# Altium PCB PSU.PcbDoc
Units mm, origin at the board's own origin, x right, y up, seen from the top; angles counter-clockwise.
Board outline 57 x 23 mm, 2 copper layers (Top Layer, Bottom Layer); 15 components, 7 nets, 35 pads, 86 vias.
Unrouted connection lines stored in the file: 1.
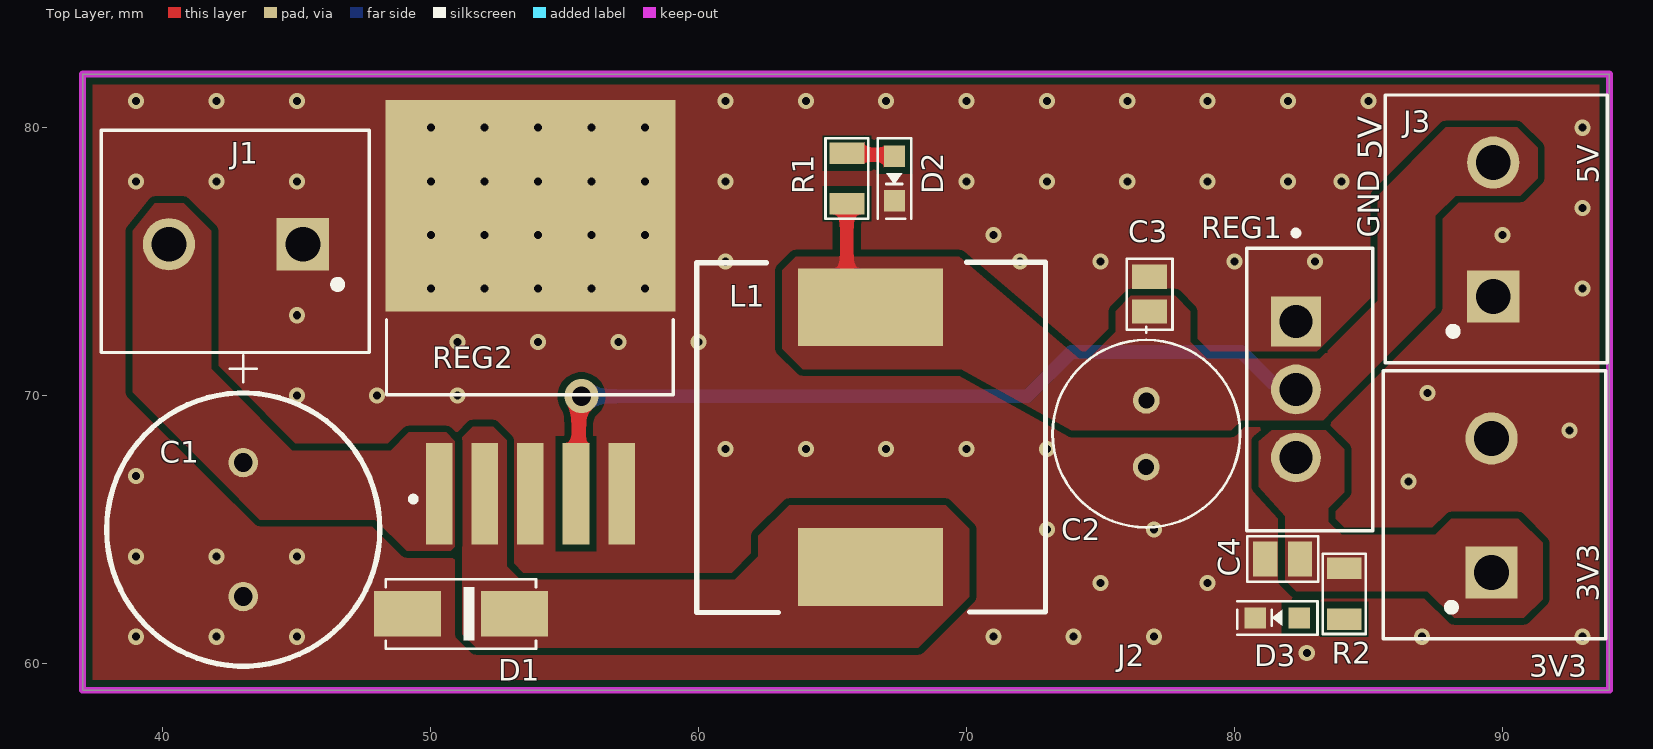
[diagram p0: Top Layer view]
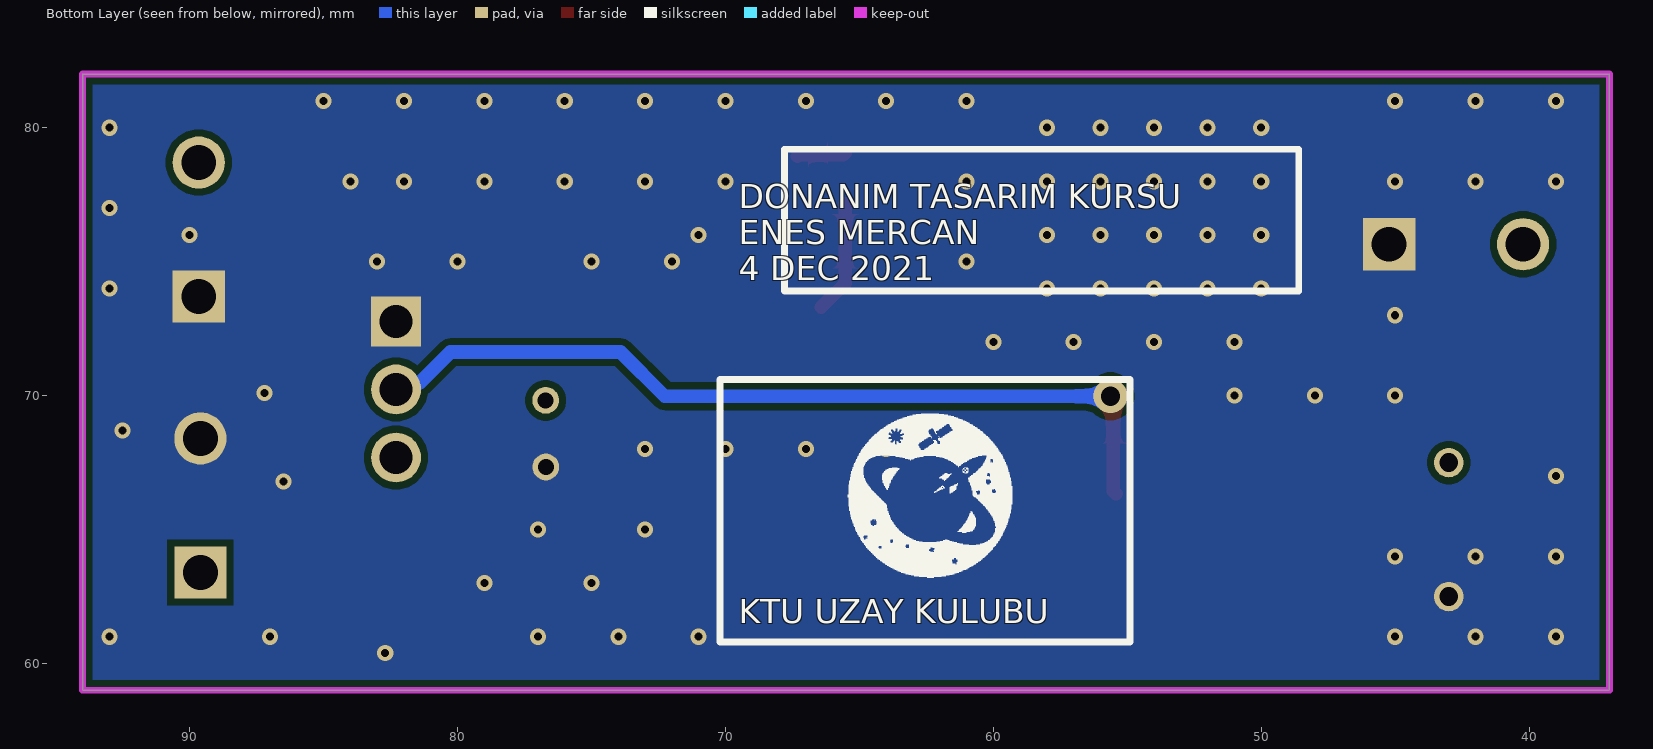
[diagram p1: Bottom Layer view, seen from below]
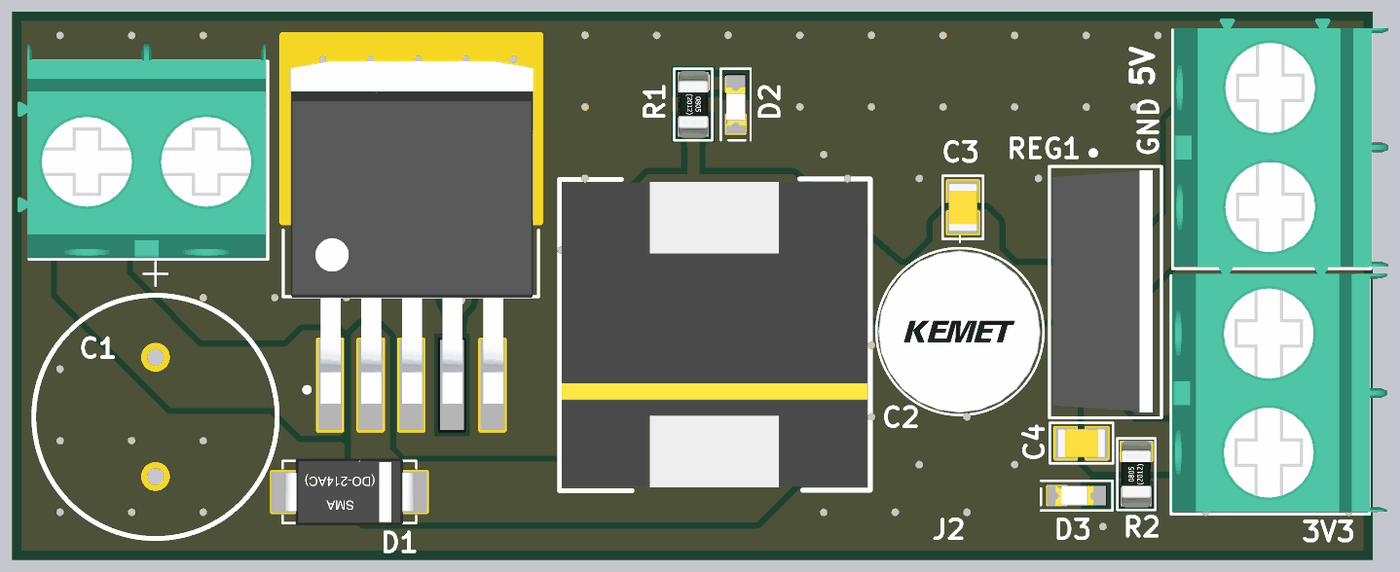
[diagram p2: 3D render of the assembled board from above, using the file's embedded part models]

## Layer stack, top to bottom
Top Solder: solder mask 0.0102, Solder Resist, Dk 3.5
Top Layer: signal copper 0.0356
Dielectric 1: dielectric 0.32, FR-4, Dk 4.8
Bottom Layer: signal copper 0.0356
Bottom Solder: solder mask 0.0102, Solder Resist, Dk 3.5

## Board outline
37,59 37,82 94,82 94,59

## Design rules (kind name [scope] priority, off if disabled: settings)
Clearance [All] p1: gap=0.254 ignorepadtopadclearanceinfootprint=FALSE except(0: Arc-Hole Track-Hole SMDPad-Hole THPad-Hole Via-Hole Fill-Hole Poly-Hole Region-Hole Text-Hole)
PolygonConnect [All] p1: connectstyle=Relief reliefconductorwidth=0.254 reliefentries=4 polygonreliefangle="90 Angle" airgapwidth=0.254
RoutingVias [All] p1: holewidth=0.711 width=1.27 viastyle="Through Hole" minholewidth=0.711 minwidth=1.27 maxholewidth=0.711 maxwidth=1.27
SolderMaskExpansion [All] p1: expansion=0.102 istentingtop=FALSE
Width [All] p1: maxlimit=2.54 minlimit=0.152 preferedwidth=0.254 minimp=50.000000 maximp=50.000000 favimp=50.000000
30 further rules are at their usual default settings.

## Components (designator, comment, footprint, x,y, rotation, side; value= is the part's Value field where it differs from the comment)
C1 "EEU-FR1V681" "CAP ALI 10MM RADIAL" 43,65 r0 top
C2 "ESH227M016AE3AA" "CAP ALI 6.30MM RADIAL" 76.708,68.58 r0 top
C3 "GRM21BR61E106MA73L" "CAP CER 0805" 76.835,73.787 r270 top
C4 "GRM21BR61E106MA73L" "CAP CER 0805" 81.8,63.9 r0 top
D1 "CDBA540-HF" DO-214AC 51.125,61.85 r180 top
D2 "150060VS75000" "LED GR 0603" 67.31,78.105 r90 top
D3 "150060VS75000" "LED GR 0603" 81.6,61.7 r0 top
J1 "2X1 KLEMENS" "2X1 CONNECTOR" 42.725,75.65 r180 top
J2 "2X1 KLEMENS" "2X1 CONNECTOR" 89.6,65.9 r90 top
J3 "2X1 KLEMENS" "2X1 CONNECTOR" 89.662,76.2 r90 top
L1 "SRR1280-330M" SRR1280-330M 66.421,68.453 r90 top
R1 "RC0805FR-07365RL" "RES 0805" 65.532,78.105 r270 top
R2 "RES 220R 0805" "RES 0805" 84.1,62.6 r90 top value=220R
REG1 "LM1117T-3V3" LM1117-3V3 82.296,72.771 r270 top
REG2 "LM2596S-5.0/NOPB" LM2596S-5.0/NOPB 53.848,72.739 r90 top

## Footprints (in the part's own frame and the unit in brackets; to place one, negate y for a bottom-side part, rotate by r counter-clockwise, add the part's x,y. Pads: shape width x height; smd on the part's side, far side on the other; paste and mask are expansions set on the pad)
"2X1 CONNECTOR" [mm]
  rect 1.95x1.95 hole 1.3: 1(-2.5,0)
  round 1.95 hole 1.3: 2(2.5,0)
  silkscreen extent -4.98,-4.26 5.02,4.04, body extent -4.9,-5 5.5,4, height 11.91
"CAP ALI 6.30MM RADIAL" [mm]
  round 1 hole 0.6 paste+0 mask+0.05: 1(0.002,1.244) 2(-0.002,-1.244)
  silkscreen extent -3.5,-3.5 3.5,3.99, body extent -3.42,-3.41 3.38,3.39, height 12.52
"CAP ALI 10MM RADIAL" [mm]
  round 1.1 hole 0.7 paste+0 mask+0.05: 1(0,2.5) 2(0,-2.5)
  silkscreen extent -5.1,-5.1 5.1,6.5, body extent -5,-5 5,5, height 20
"CAP CER 0805" [mm]
  rect 0.9x1.3 smd mask+0.075: 1(-0.65,0) 2(0.65,0)
  silkscreen extent -1.33,-0.85 1.33,0.85, body extent -1,-0.6 1,0.6, height 1.46
DO-214AC [mm]
  rect 2.5x1.7 smd paste+0 mask+0.075: A(2,0) C(-2,0)
  silkscreen extent -2.8,-1.3 2.8,1.3, body extent -2.75,-1.4 2.75,1.4, height 2.6
"LED GR 0603" [mm]
  rect 0.8x0.8 smd mask+0.05: 1(-0.825,0) 2(0.825,0)
  silkscreen extent -1.5,-0.63 1.5,0.62, body extent -0.9,-0.4 0.7,0.4, height 0.7
LM1117-3V3 [mm]
  rect 1.86x1.86 hole 1.24: 1(0,0)
  round 1.86 hole 1.24: 2(2.54,0) 3(5.08,0)
  silkscreen extent -3.4,-1.84 7.81,2.86, body extent -2.58,-1.7 7.58,2.5, height 23.25
LM2596S-5.0/NOPB [mm]
  rect 3.79x0.99 smd: 1(-6.4,3.527) 2(-6.4,1.827) 3(-6.4,0.127) 4(-6.4,-1.573) 5(-6.4,-3.273)
  rect 7.88x10.84 smd paste-6: 3(4.35,0.127)
  silkscreen extent -6.7,-5.2 0.09,5.5, body extent -7.18,-4.98 7.18,5.18, height 4.66
"RES 0805" [mm]
  rect 0.8x1.3 smd mask+0.05: 1(-0.95,0) 2(0.95,0)
  silkscreen extent -1.5,-0.8 1.5,0.8, body extent -1.4,-0.62 1.4,0.62, height 0.8
SRR1280-330M [mil]
  rect 114x213 smd paste+0 mask+0: 1(-191,0) 2(191,0)
  silkscreen extent -258,-257 257,255, body extent -252,-252 252,252, height 315

## Part data
C1: library part "CAP ALUM 680UF 35V  RADIAL", "CAP ALUM 680UF 20% 35V RADIAL", Capacitance=680uF, Case/Package=Radial, ESR (Equivalent Series Resistance)=20mR, Leakage Current=3uA, Manufacturer=Panasonic, Max Operating Temperature=105°C, Min Operating Temperature=-40°C, Package Quantity=200, Ripple Current=2.18A, Supplier Part Number 1=P14514-ND, Tolerance=20%, Voltage=35V, Category="Aluminum Electrolytic Capacitors", ComponentLink1Description=https://datasheet.ciiva.com/11780/0900766b80e4e9bf-11780986.pdf?src-supplier=RSComponents, ComponentLink1URL=https://datasheet.ciiva.com/11780/0900766b80e4e9bf-11780986.pdf?src-supplier=RSComponents, ComponentLink2Description=https://datasheet.ciiva.com/11677/aba0000ce132-11677717.pdf?src-supplier=Avnet, ComponentLink2URL=https://datasheet.ciiva.com/11677/aba0000ce132-11677717.pdf?src-supplier=Avnet, ComponentLink3Description=https://datasheet.ciiva.com/14602/70257620-14602587.pdf?src-supplier=Allied+Electronics, ComponentLink3URL=https://datasheet.ciiva.com/14602/70257620-14602587.pdf?src-supplier=Allied+Electronics, ComponentLink4Description=https://datasheet.ciiva.com/30145/9aba0000ce132-30145388.pdf?src-supplier=Onlinecomponents.com, ComponentLink4URL=https://datasheet.ciiva.com/30145/9aba0000ce132-30145388.pdf?src-supplier=Onlinecomponents.com, ComponentLink5Description=https://datasheet.ciiva.com/17531/aba0000ce132-17531901.pdf?src-supplier=Avnet+Europe, ComponentLink5URL=https://datasheet.ciiva.com/17531/aba0000ce132-17531901.pdf?src-supplier=Avnet+Europe, Construction=RADIAL, Contact Plating=Tin, Diameter=10mm, Height=20mm, Height - Seated (Max)=0.866inch, Impedance=20mR, Lead Diameter=0.6mm, Lead Pitch=5mm, Lead/Base Style=Straight, Length=20mm, Life (Hours)=10000Hour, Manufacturer Part Number=EEU-FR1V681, Mount="Through Hole", Number of Pins=2, Packaging=Bulk, Pricing 1="1=1.09000, 10=0.82700, 50=0.68680, 100=0.59140, 500=0.45788, 1000=0.39429, 2500=0.36885, 5000=0.34977 (USD)", Radiation Hardening=No, REACH SVHC=Unknown, Ripple Current (AC)=2.18A, RoHS=Yes, RoHS Compliant=Yes, Series=FR, Stock 1=13043, Supplier 1=Digi-Key, Termination=Radial, Voltage Rating=35V, Voltage Rating (DC)=35V, Weight=2.5
C2: library part "CAP ALUM 220UF 16V  RADIAL_1", "Capacitor;  Al Electrolytic;  Cap 220 uF;  Tol 20%;  Vol-Rtg 16 VDC;  Radial;  6x11 mm", Capacitance=220uF, Case/Package=Radial, Dielectric Material=Aluminium, Leakage Current=35.2uA, Manufacturer=KEMET, Max Operating Temperature=105°C, Min Operating Temperature=-40°C, Package Quantity=10000, Ripple Current=235mA, Supplier Part Number 1=399-6566-ND, Tolerance=20%, Voltage=16V, Category="Aluminum Electrolytic Capacitors", ComponentLink1Description=https://datasheet.ciiva.com/14587/70233271-14587391.pdf?src-supplier=Allied+Electronics, ComponentLink1URL=https://datasheet.ciiva.com/14587/70233271-14587391.pdf?src-supplier=Allied+Electronics, Diameter=6.3mm, Dissipation Factor=18%, Features="General Purpose", Height=11mm, Height - Seated (Max)=0.492inch, Lead Diameter=0.5mm, Lead Length=20mm, Lead Pitch=0.098inch, Length=11mm, Life (Hours)=2000Hour, Manufacturer Part Number=ESH227M016AE3AA, Mount="Through Hole,PCB", Packaging=Bulk, Pricing 1="1=0.26000, 10=0.17700, 50=0.11780, 100=0.10010, 500=0.07066, 1000=0.06182, 2500=0.05888, 5000=0.05446 (USD)", RoHS=Yes, RoHS Compliant=Yes, Series=ESH, Stock 1=8987, Supplier 1=Digi-Key, Termination=Radial, Voltage Rating=16V, Voltage Rating (DC)=16V, Weight=0.6
C3 C4: library part "CAP CER 10UF 25V 0805", "MURATA - GRM21BR61E106MA73L - SMD Multilayer Ceramic Capacitor, 10 µF, 25 V, 0805 [2012 Metric], ± 20%, X5R, GRM Series", Capacitance=10uF, Case Code (Imperial)=0805, Case Code (Metric)=2012, Dielectric=X5R, Manufacturer=Murata, Max Operating Temperature=85°C, Min Operating Temperature=-55°C, Package Quantity=3000, Resistor Type=Ceramic, Supplier Part Number 1=490-10748-1-ND, Tolerance=20%, Voltage Rating=25V, Case/Package=0805, Category="Ceramic Capacitors", ComponentLink1Description=http://www.farnell.com/datasheets/2079185.pdf?src-supplier=Farnell, ComponentLink1URL=http://www.farnell.com/datasheets/2079185.pdf?src-supplier=Farnell, ComponentLink2Description=http://www.mouser.com/ds/2/281/c02e-2905.pdf?src-supplier=Mouser, ComponentLink2URL=http://www.mouser.com/ds/2/281/c02e-2905.pdf?src-supplier=Mouser, ComponentLink3Description=http://components.arrow.com/part/dataview/0323_03061623?src-supplier=Arrow+Europe, ComponentLink3URL=http://components.arrow.com/part/dataview/0323_03061623?src-supplier=Arrow+Europe, ComponentLink4Description=https://search.murata.co.jp/Ceramy/image/img/A01X/G101/ENG/GRM21BR61E106MA73-01.pdf?src-supplier=Digi-Key, ComponentLink4URL=https://search.murata.co.jp/Ceramy/image/img/A01X/G101/ENG/GRM21BR61E106MA73-01.pdf?src-supplier=Digi-Key, ComponentLink5Description=http://www.farnell.com/datasheets/2079185.pdf?src-supplier=Element14, ComponentLink5URL=http://www.farnell.com/datasheets/2079185.pdf?src-supplier=Element14, Depth=1.25mm, Height=1.25mm, Lead Free="Lead Free", Length=2mm, Manufacturer Part Number=GRM21BR61E106MA73L, Mount="Surface Mount", Packaging="Tape and Reel", Pricing 1="1=0.26000, 10=0.17900, 50=0.11960, 100=0.10170, 500=0.07176, 1000=0.06279 (USD)", REACH SVHC="No SVHC", RoHS=Yes, RoHS Compliant=Yes, Stock 1=318119, Supplier 1=Digi-Key, Termination=SMD/SMT, Thickness=0.055inch, Voltage Rating (DC)=25V, Weight=0.000335oz, Width=0.049inch
D1: "DIODE SCHOTTKY 40V 5A DO214AC", Average Rectified Current=5A, Manufacturer=Comchip, Max Reverse Voltage (DC)=40V, Supplier Part Number 1=641-1707-1-ND, Category="Rectifier Diodes", ComponentLink1Description=http://www.mouser.com/ds/2/80/CDBA520-HF%20Thru134737.%20CDBA5200-HF%20RevB-221146.pdf?src-supplier=Mouser, ComponentLink1URL=http://www.mouser.com/ds/2/80/CDBA520-HF%20Thru134737.%20CDBA5200-HF%20RevB-221146.pdf?src-supplier=Mouser, ComponentLink2Description=http://www.comchiptech.com/admin/files/product/CDBA540-HF%20Thru504741.%20CDBA5200-HF%20RevC.pdf?src-supplier=Digi-Key, ComponentLink2URL=http://www.comchiptech.com/admin/files/product/CDBA540-HF%20Thru504741.%20CDBA5200-HF%20RevC.pdf?src-supplier=Digi-Key, Manufacturer Part Number=CDBA540-HF, Mount="Surface Mount", Packaging="Tape and Reel", Pricing 1="1=0.51000, 10=0.41000, 100=0.27930, 500=0.20948, 1000=0.15711, 2000=0.14402 (USD)", RoHS=Yes, RoHS Compliant=Yes, Series=-, Stock 1=101065, Supplier 1=Digi-Key
D2 D3: library part "LED GR 0603", "CRCW Thick Film Commodity Chip Resistor 0603 Size 5.1K Ohm 1% 0.1 W 100 ppm/K 2-Pin SMD Paper T/R", Case Code (Imperial)=0603, Case Code (Metric)=1608, Color=Green, Forward Current=30mA, Forward Voltage=2V, Manufacturer="Wurth Electronics", Max Operating Temperature=85°C, Max Power Dissipation=100mW, Min Operating Temperature=-40°C, Package Quantity=1, Resistance=5.1kR, Resistor Type="Thick Film", Supplier Part Number 1=732-4980-1-ND, Temperature Coefficient=100ppm/°C, Test Current=20mA, Tolerance=1%, Case/Package=0603, Category=LEDs, ComponentLink1Description=https://datasheet.ciiva.com/29562/150060vs75000-29562919.pdf?src-supplier=Digi-Key, ComponentLink1URL=https://datasheet.ciiva.com/29562/150060vs75000-29562919.pdf?src-supplier=Digi-Key, ComponentLink2Description=http://www.vishay.com/docs/28773/crcwce3.pdf?src-supplier=Digi-Key, ComponentLink2URL=http://www.vishay.com/docs/28773/crcwce3.pdf?src-supplier=Digi-Key, Dominant Wavelength=570nm, Height=0.7mm, Length=1.6mm, Lens Style=Clear,Rectangular, Luminous Intensity=40mcd, Manufacturer Part Number=150060VS75000, Mount="Surface Mount", Number of Pins=2, Number of Terminations=2, Packaging="Tape and Reel", Pricing 1="1=0.14000, 50=0.13300, 100=0.11400, 500=0.10500, 1000=0.09900 (USD)", Pricing 2="1=0.10000, 10=0.03600, 100=0.01450, 1000=0.00652, 2500=0.00566, 5000=0.00468 (USD)", REACH SVHC=Unknown, RoHS=Yes, RoHS Compliant=Yes, Stock 1=170555, Stock 2=49532, Supplier 1=Digi-Key, Supplier 2=Digi-Key, Supplier Part Number 2=541-CRCW06035K10FKEBCCT-ND, Viewing Angle=140°, Wavelength=570nm, Weight=0.025, Width=0.8mm
J1 J2 J3: "Conn PC Terminal Block 2 POS 5mm Solder ST Thru-Hole 17.5A", Color=Green, Current=18A, Current Rating=17.5A, Flammability Rating="UL94 V-0", Manufacturer="Phoenix Contact", Manufacturer Part Number=1935161, Max Current Rating=16A, Max Supply Voltage=250V, Package Quantity=250, Supplier Part Number 1=277-1667-ND, Voltage=300V, Voltage Rating (DC)=320V, Approvals=UL, Category="Terminal Blocks", ComponentLink1Description=https://datasheet.ciiva.com/16047/1935161-16047247.pdf?src-supplier=Onlinecomponents.com, ComponentLink1URL=https://datasheet.ciiva.com/16047/1935161-16047247.pdf?src-supplier=Onlinecomponents.com, ComponentLink2Description=https://datasheet.ciiva.com/15169/getdatasheetpartid-177903-15169663.pdf?src-supplier=Verical, ComponentLink2URL=https://datasheet.ciiva.com/15169/getdatasheetpartid-177903-15169663.pdf?src-supplier=Verical, ComponentLink3Description=https://datasheet.ciiva.com/824/combiconcompact5-0mmseries-824222.pdf?src-supplier=Digi-Key, ComponentLink3URL=https://datasheet.ciiva.com/824/combiconcompact5-0mmseries-824222.pdf?src-supplier=Digi-Key, Connector Type=Screw, Contact Material=Copper,Tin, Depth=9mm, Height=11.3mm, Housing Color=Green, Housing Material=Polyamide, Insulation Material=Nylon, Lead Free="Lead Free", Length=9mm, Material=Nylon, Mount="Through Hole", Number of Circuits=2, Number of Contacts=2, Number of Levels=1, Number of Pins=2, Number of Poles=2, Number of Positions=2, Number of Positions Per Level=2, Number of Rows=1, Number of Ways=2, Orientation=Straight, Packaging=Bulk, Pitch=5mm, Pricing 1="1=0.47000, 10=0.44900, 50=0.42900, 100=0.41730, 250=0.39000, 500=0.37128 (USD)", Radiation Hardening=No, REACH SVHC=Unknown, RoHS=Yes, RoHS Compliant=Yes, Series="COMBICON PT", Stock 1=135087, Supplier 1=Digi-Key, Termination=Solder, Voltage Rating=250V, Weight=0.067021oz, Width=14.9mm, Wire Gauge (Max)=26AWG, Wire Gauge (Min)=12AWG, Wire/Cable Gauge=26AWG
L1: library part "IND 33uH", "33uH 20% 100KHz Ind Power Shielded Wirewound  28Q-Factor Ferrite 3.5A T/R", Case/Package=Nonstandard, Current Rating=3.5A, DC Resistance (DCR)=57mR, Frequency=9.5MHz, Inductance=33uH, Inductance Tolerance=20%, Manufacturer=Bourns, Max Operating Temperature=125°C, Min Operating Temperature=-40°C, Package Quantity=400, Resistance=57MR, Resistor Type=Wirewound, Saturation Current=3.3A, Supplier Part Number 1=SRR1280-330MCT-ND, Test Frequency=100kHz, Category="Fixed Inductors", ComponentLink1Description=https://datasheet.ciiva.com/11799/0900766b80ddd400-11799870.pdf?src-supplier=RSComponents, ComponentLink1URL=https://datasheet.ciiva.com/11799/0900766b80ddd400-11799870.pdf?src-supplier=RSComponents, ComponentLink2Description=https://datasheet.ciiva.com/17112/70277071-17112985.pdf?src-supplier=Allied+Electronics, ComponentLink2URL=https://datasheet.ciiva.com/17112/70277071-17112985.pdf?src-supplier=Allied+Electronics, ComponentLink3Description=https://datasheet.ciiva.com/8512/srr1280-8512893.pdf?src-supplier=Avnet, ComponentLink3URL=https://datasheet.ciiva.com/8512/srr1280-8512893.pdf?src-supplier=Avnet, ComponentLink4Description=https://datasheet.ciiva.com/6696/srr1280-6696735.pdf?src-supplier=Digi-Key, ComponentLink4URL=https://datasheet.ciiva.com/6696/srr1280-6696735.pdf?src-supplier=Digi-Key, ComponentLink5Description=https://datasheet.ciiva.com/17285/srr1280-17285215.pdf?src-supplier=Avnet+Europe, ComponentLink5URL=https://datasheet.ciiva.com/17285/srr1280-17285215.pdf?src-supplier=Avnet+Europe, ComponentLink6Description=https://datasheet.ciiva.com/30162/srr1280-30162751.pdf?src-supplier=Onlinecomponents.com, ComponentLink6URL=https://datasheet.ciiva.com/30162/srr1280-30162751.pdf?src-supplier=Onlinecomponents.com, ComponentLink7Description=https://datasheet.ciiva.com/48488/srr1280-48488287.pdf?src-supplier=Avnet, ComponentLink7URL=https://datasheet.ciiva.com/48488/srr1280-48488287.pdf?src-supplier=Avnet, Core Material=Ferrite, DC Current=3.5A, Depth=12.8mm, Height=7.5mm, Height - Seated (Max)=0.315inch, Length=12.5mm, Manufacturer Part Number=SRR1280-330M, Material=Steel, Max DC Current=3.5A, Military Standard=Not, Mount="Surface Mount", Number of Pins=2, Packaging="Tape and Reel", Pricing 1="1=1.25000, 10=1.16400, 25=1.07400, 50=0.89520, 100=0.84140 (USD)", Q Factor=28, Radiation Hardening=No, REACH SVHC="No SVHC", RMS Current (Irms)=3.5A, RoHS=Yes, RoHS Compliant=Yes, Sample Rate (Hz)=100kHz, Self Resonant Frequency=9.5MHz, Series=SRR1280, Shielding=Shielded, Stock 1=7352, Supplier 1=Digi-Key, Termination=SMD/SMT, Tolerance=20%, Weight=4.2, Width=12.5mm
R1: library part "RES 365R 0805", "RES SMD 365 OHM 1% 1/8W 0805", Case Code (Imperial)=0805, Case Code (Metric)=2012, Manufacturer=Yageo, Max Operating Temperature=155°C, Max Power Dissipation=125mW, Min Operating Temperature=-55°C, Resistance=365R, Resistor Type="Thick Film", Supplier Part Number 1=311-365CRCT-ND, Temperature Coefficient=100ppm/°C, Tolerance=1%, Voltage Rating=150V, Case/Package=0805, Category="Chip SMD Resistors", ComponentLink1Description=http://components.arrow.com/part/dataview/0323_03541250?src-supplier=Arrow+Europe, ComponentLink1URL=http://components.arrow.com/part/dataview/0323_03541250?src-supplier=Arrow+Europe, ComponentLink2Description=http://www.yageo.com/documents/recent/PYu-RC_Group_51_RoHS_L_9.pdf?src-supplier=Digi-Key, ComponentLink2URL=http://www.yageo.com/documents/recent/PYu-RC_Group_51_RoHS_L_9.pdf?src-supplier=Digi-Key, ComponentLink3Description=http://www.yageo.ru/pdf/RC0805.pdf?src-supplier=Mouser, ComponentLink3URL=http://www.yageo.ru/pdf/RC0805.pdf?src-supplier=Mouser, ComponentLink4Description=http://www.yageo.ru/pdf/RC0805.pdf?src-supplier=Future+Electronics, ComponentLink4URL=http://www.yageo.ru/pdf/RC0805.pdf?src-supplier=Future+Electronics, ComponentLink5Description=http://www.yageo.com.tw/exep/pages/download/literatures/PYu-R_INT-thick_7.pdf?src-supplier=Digi-Key, ComponentLink5URL=http://www.yageo.com.tw/exep/pages/download/literatures/PYu-R_INT-thick_7.pdf?src-supplier=Digi-Key, Construction=Rectangular, Depth=1.25mm, Features="Moisture Resistant", Height=0.5mm, Lead Free="Lead Free", Length=2mm, Manufacturer Part Number=RC0805FR-07365RL, Military Standard=Not, Number of Terminations=2, Packaging="Tape and Reel", Power Rating=125mW, Pricing 1="1=0.10000, 10=0.04200, 100=0.01690, 1000=0.00759, 2500=0.00659 (USD)", RoHS=Yes, RoHS Compliant=Yes, Series=RC, Size Code=0805, Stock 1=53868, Supplier 1=Digi-Key, Termination=SMD/SMT, Voltage Rating (DC)=150V, Weight=0.002, Width=1.25mm
R2: "Res Thick Film 0805 220 Ohm 5% 0.125W(1/8W) ±100ppm/C Pad SMD Automotive T/R", Manufacturer="TE Connectivity", Manufacturer Part Number=CRGCQ0805J220R, Supplier Part Number 1=A130130CT-ND, Category="Chip SMD Resistors", Pricing 1="1=0.10000, 10=0.04300, 100=0.01740, 1000=0.00783, 2500=0.00680 (USD)", RoHS=Yes, RoHS Compliant=Yes, Stock 1=66860, Supplier 1=Digi-Key
REG1: "800-mA 15-V linear voltage regulator 3-TO-220 0 to 125", Case/Package=TO-220, Current Rating=800A, Dropout Voltage=1.2V, Manufacturer="TI National Semiconductor", Manufacturer Part Number=LM1117T-3.3/NOPB, Max Input Voltage=15V, Max Operating Temperature=125°C, Max Output Current=800mA, Min Operating Temperature=-40°C, Nominal Output Voltage=3.3V, Output Voltage Accuracy=1%, Package Quantity=45, Quiescent Current=10mA, Supplier Part Number 1=926-LM1117T-3.3/NOPB, Accuracy=1%, Category="Voltage Regulators - Linear", ComponentLink1Description=https://datasheet.ciiva.com/15111/getdatasheetpartid-67377-15111321.pdf?src-supplier=Verical, ComponentLink1URL=https://datasheet.ciiva.com/15111/getdatasheetpartid-67377-15111321.pdf?src-supplier=Verical, ComponentLink2Description=https://datasheet.ciiva.com/19480/242115-19480555.pdf?src-supplier=Jameco, ComponentLink2URL=https://datasheet.ciiva.com/19480/242115-19480555.pdf?src-supplier=Jameco, ComponentLink3Description=https://datasheet.ciiva.com/41457/001013630-da-01-en-ic-reg-ldo-lm1117t-3-3-nopb-to-220-3-tid-41457409.pdf?src-supplier=Conrad, ComponentLink3URL=https://datasheet.ciiva.com/41457/001013630-da-01-en-ic-reg-ldo-lm1117t-3-3-nopb-to-220-3-tid-41457409.pdf?src-supplier=Conrad, ComponentLink4Description=https://datasheet.ciiva.com/26904/lm1117t-3-3-nopb-26904894.pdf?src-supplier=IIIC, ComponentLink4URL=https://datasheet.ciiva.com/26904/lm1117t-3-3-nopb-26904894.pdf?src-supplier=IIIC, ComponentLink5Description=https://datasheet.ciiva.com/1511/1882372-1511717.pdf?src-supplier=Element14, ComponentLink5URL=https://datasheet.ciiva.com/1511/1882372-1511717.pdf?src-supplier=Element14, ComponentLink6Description=https://datasheet.ciiva.com/2047/lm1117-n-2047767.pdf?src-supplier=Digi-Key, ComponentLink6URL=https://datasheet.ciiva.com/2047/lm1117-n-2047767.pdf?src-supplier=Digi-Key, ComponentLink7Description=https://datasheet.ciiva.com/14150/ialm1117t-e-14150010.pdf?src-supplier=Distrelec, ComponentLink7URL=https://datasheet.ciiva.com/14150/ialm1117t-e-14150010.pdf?src-supplier=Distrelec, Contact Plating=Tin,Matte, Height=8.89mm, Lead Free="Lead Free", Length=10.16mm, Mount="Through Hole", Number of Outputs=1, Number of Pins=3, Output Current=800mA, Output Type=Fixed, Output Voltage=3.3V, Packaging=Rail/Tube, Polarity=Positive, Pricing 1="1=1.77000, 10=1.59000, 50=1.50000, 100=1.50000, 1000=1.50000, 10000=1.50000 (USD)", Radiation Hardening=No, REACH SVHC="No SVHC", RoHS=Yes, RoHS Compliant=Yes, Stock 1=1900, Supplier 1=Mouser, Weight=0.01lb, Width=4.7mm
REG2: "Conv DC-DC 4.5V to 40V Inv/Step Down Single-Out 5V 3A 6-Pin(5+Tab) TO-263 Tube", Case/Package=TO-263, Manufacturer="TI National Semiconductor", Max Input Voltage=40V, Max Operating Temperature=125°C, Max Output Current=3A, Min Input Voltage=4.5V, Min Operating Temperature=-40°C, Nominal Output Voltage=5V, Package Quantity=45, Quiescent Current=5mA, Supplier Part Number 1=926-LM2596S-5.0/NOPB, Switching Frequency=173kHz, Category="Power Supply Modules", ComponentLink1Description=https://datasheet.ciiva.com/15112/getdatasheetpartid-112894-15112928.pdf?src-supplier=Verical, ComponentLink1URL=https://datasheet.ciiva.com/15112/getdatasheetpartid-112894-15112928.pdf?src-supplier=Verical, ComponentLink2Description=https://datasheet.ciiva.com/14150/jqlm2596x-xx-e-14150651.pdf?src-supplier=Distrelec, ComponentLink2URL=https://datasheet.ciiva.com/14150/jqlm2596x-xx-e-14150651.pdf?src-supplier=Distrelec, ComponentLink3Description=https://datasheet.ciiva.com/27050/836385-27050287.pdf?src-supplier=Jameco, ComponentLink3URL=https://datasheet.ciiva.com/27050/836385-27050287.pdf?src-supplier=Jameco, ComponentLink4Description=https://datasheet.ciiva.com/41457/001013813-da-01-en-ic-reg-buc-lm2596s-5-0-nopb-to-263-5-tid-41457757.pdf?src-supplier=Conrad, ComponentLink4URL=https://datasheet.ciiva.com/41457/001013813-da-01-en-ic-reg-buc-lm2596s-5-0-nopb-to-263-5-tid-41457757.pdf?src-supplier=Conrad, ComponentLink5Description=https://datasheet.ciiva.com/6596/lm2596-6596343.pdf?src-supplier=Digi-Key, ComponentLink5URL=https://datasheet.ciiva.com/6596/lm2596-6596343.pdf?src-supplier=Digi-Key, ComponentLink6Description=https://datasheet.ciiva.com/22669/1874590-22669463.pdf?src-supplier=Element14, ComponentLink6URL=https://datasheet.ciiva.com/22669/1874590-22669463.pdf?src-supplier=Element14, ComponentLink7Description=https://datasheet.ciiva.com/16536/lm2596-16536124.pdf?src-supplier=Avnet+Asia, ComponentLink7URL=https://datasheet.ciiva.com/16536/lm2596-16536124.pdf?src-supplier=Avnet+Asia, Contact Plating=Tin,Matte, Efficiency=80%, Height=4.57mm, Lead Free="Contains Lead", Length=10.16mm, Manufacturer Part Number=LM2596S-5.0/NOPB, Mount="Surface Mount", Number of Outputs=1, Number of Pins=5, Operating Supply Voltage=40V, Output Current=3A, Output Type=Fixed, Output Voltage=5V, Packaging=Rail/Tube, Pricing 1="1=7.15000, 10=6.46000, 50=6.16000, 100=5.34000, 1000=5.34000, 10000=5.34000 (USD)", Radiation Hardening=No, REACH SVHC="No SVHC", RoHS=Yes, Stock 1=3519, Supplier 1=Mouser, Weight=0.25lb, Width=8.64mm

## Via types
v1: diameter 0.6, hole 0.3, Top Layer to Bottom Layer, tented both sides, 85 vias
v2: diameter 1.27, hole 0.711, Top Layer to Bottom Layer, tented both sides, 1 vias

## Nets (pads, with @x,y where several pads share a name; then routed paths per layer and width w, separated by ;. In a path a pad name is that pad's centre, name@x,y a point inside that pad or via, vN(x,y) a via of type N, cw(c..) or ccw(c..) an arc to the next point about the centre after c; other vN are vias at no path point)
+3.3VDC: C4.2 J2.1 R2.2 REG1.3
+5VDC: C2.1 C3.2 J3.2 L1.2 R1.2 REG1.2 REG2.4 | length 35.9
  Top Layer w0.508: REG2.4 55.524,66.442 55.524,69.875 v2(55.626,69.977) ; R1.2 65.532,74.193 L1.2
  Bottom Layer w0.508: v2(55.626,69.977) 72.263,69.977 73.914,71.628 80.264,71.628 81.402,70.49 82.037,70.49 REG1.2
+BAT: C1.1 J1.2 REG2.1
GND: C1.2 C2.2 C3.1 C4.1 D1.A D2.1 D3.1 J1.1 J2.2 J3.1 REG1.1 REG2.3 REG2.5
  other v1: 82.7,60.4 39,61 42,61 45,61 71,61 74,61 77,61 87,61 93,61 75,63 79,63 39,64 42,64 45,64 73,65 77,65 86.5,66.8 39,67 61,68 64,68 67,68 70,68 73,68 92.5,68.7 45,70 48,70 51,70 87.2,70.1 51,72 54,72 57,72 60,72 45,73 50,74 52,74 54,74 56,74 58,74 93,74 61,75 72,75 75,75 80,75 83,75 50,76 52,76 54,76 56,76 58,76 71,76 90,76 93,77 39,78 42,78 45,78 50,78 52,78 54,78 56,78 58,78 61,78 70,78 73,78 76,78 79,78 82,78 84,78 50,80 52,80 54,80 56,80 58,80 93,80 39,81 42,81 45,81 61,81 64,81 67,81 70,81 73,81 76,81 79,81 82,81 85,81
NetD1_C: D1.C L1.1 REG2.2
NetD2_2: D2.2 R1.1 | length 1.8
  Top Layer w0.508: R1.1 65.594,78.992 67.248,78.992 D2.2
NetD3_2: D3.2 R2.1

## Polygon pours and split planes (outlines as drawn)
+3.3VDC on Top Layer "+3.3VDC_L01_P020" (solid, remove dead copper, pour order 20): 80.9,68.3 80.9,66.6 81.9,65.5 81.9,63.1 82.3,62.7 87.2,62.7 88.2,61.7 90.8,61.7 91.5,62.4 91.5,64.5 90.6,65.4 88.1,65.4 87.5,64.8 84,64.8 83.5,65.3 83.5,65.8 84.1,66.4 84.1,68 83.4,68.7 81.4,68.7
GND on Top Layer "GND_L01_P019" (solid, remove dead copper, pour order 19): 36.5,83.2 95.5,83.2 95.5,57.2 36.5,57.2
+BAT on Top Layer "+BAT_L01_P017" (solid, remove dead copper, pour order 17): 44.825,67.95 48.5,67.95 49.175,68.625 50.575,68.625 50.9,68.3 50.9,64.35 50.75,64.2 49.1,64.2 47.925,65.375 43.625,65.375 41.975,67.025
+BAT on Top Layer "+BAT_L01_P016" (solid, remove dead copper, pour order 16): 38.875,76.15 39.7,77.175 40.775,77.175 41.8,76.15 41.8,71 43.625,69.175 43.625,69.15 44.825,67.95 43.7,66.825 42.175,66.825 38.875,70.125 38.875,71.85
+5VDC on Top Layer "+5VDC_L01_P012" (solid, remove dead copper, pour order 12): 83.058,71.374 83.185,71.374 85.344,73.533 85.344,77.47 87.884,80.01 90.551,80.01 91.313,79.248 91.313,78.105 90.678,77.47 88.265,77.47 87.503,76.708 87.503,73.279 83.312,69.088
+5VDC on Top Layer "+5VDC_L01_P011" (solid, remove dead copper, pour order 11): 74.549,71.374 75.565,72.39 75.565,73.152 76.138,73.725 77.786,73.725 78.359,73.152 78.359,72.009 78.994,71.374 83.45,71.374 83.693,70.739 83.693,69.469 83.312,69.088 80.264,69.088 79.883,68.707 77.343,68.707
+5VDC on Top Layer "+5VDC_L01_P006" (solid, remove dead copper, pour order 6): 63.119,74.676 63.627,75.184 69.723,75.184 74.199,71.374 74.676,71.374 76.962,71.374 77.978,70.358 77.978,69.342 77.343,68.707 73.914,68.707 69.799,70.993 63.881,70.993 63.119,71.755
NetD1_C on Top Layer "NETD1_C_L01_P005" (solid, remove dead copper, pour order 5): 51.181,68.453 51.562,68.834 52.324,68.834 52.832,68.326 52.832,63.627 53.34,63.119 61.341,63.119 62.23,64.008 62.23,64.77 63.373,65.913 69.215,65.913 70.104,65.024 70.104,62.484 68.199,60.579 51.689,60.579 51.181,61.087
GND on Bottom Layer "GND_L02_P018" (solid, remove dead copper, pour order 18): 36,84 95,84 95,58 36,58

## Keep-outs
Keep-Out Layer:
  the board outline again, w0.254

## Silkscreen, mask and mechanical layers (free items; w line width, h text height)
Top Overlay:
  text "5V" at 85.5,78.8 h0.9 r90
  text "5V" at 93.6,77.9 h0.8 r90
  text "GND" at 85.4,75.9 h0.8 r90
  text "3V3" at 93.6,62.3 h0.8 r90
  text "3V3" at 91,59.5 h0.8
Bottom Overlay:
  drawing of 15 lines, arcs and shapes, not listed
  text "DONANIM TASARIM KURSU / ENES MERCAN / 4 DEC 2021" at 69.5,74.3 h0.9
  text "KTU UZAY KULUBU" at 69.5,61.5 h0.9
Drill Drawing:
  the board outline again, w0.1